# EAGLE board Cell Characteristic Modeling (EAGLE 7.6.0)

Size 73.58 x 63.39 mm. Coordinates in mm from the lower left corner, seen from the top.
Outline: 0,0 56.82,0 56.82,53.33 0,53.33 0,0
Copper layers (1*16): Top 0.035mm / dielectric 1.5mm / Bottom 0.035mm
Design rules "default": minimum track width 10mil, minimum drill 24mil, track to track 8mil, track to pad 8mil, pad to pad 8mil, via to via 8mil, smd to smd 8mil, copper to edge 40mil, drill to drill 8mil, minimum pad ring 10mil, minimum via ring 8mil, stop-mask expansion 4mil, vias tented up to drill 0mil, thermal gap 10mil

## Footprints (pad centres in the part's own frame; a part is rotated, then mirrored left to right if it is on the bottom)
M3XXH = drill 1.016 long: 1 -3.81,3.81; 2 -3.81,-3.81; O -6.35,-3.81; P 6.35,-3.81; P@ 6.35,3.81; S -6.35,3.81
2P-2.54-65/35MIL = drill 0.889 pad 1.651 square: 1 0,1.27 | drill 0.889 pad 1.651: 2 0,-1.27
PIEZO-22MM = drill 1 pad 2.54: P$1 -5,0; P$2 5,0
PHOTORESISTOR-2.54 = drill 1 pad 1.5: P$1 -1.27,0; P$2 1.27,0
0207/10 = drill 0.813 octagon: 1 -5.08,0; 2 5.08,0
TL1105 = drill 1 pad 1.676: 1 -2.25,3.25; 2 2.25,3.25; 3 -2.25,-3.25; 4 2.25,-3.25
TO220 = drill 1.118 long: 1 -2.54,-6.35; 2 0,-6.35; 3 2.54,-6.35 | hole 3.302: 0,11.176
ARDUINO_UNO = drill 1.016 pad 1.88: 0 63.5,50.8; 1 60.96,50.8; 2 58.42,50.8; 3 55.88,50.8; 3.3V 35.56,2.54; 4 53.34,50.8; 5 50.8,50.8; 5V 38.1,2.54; 6 48.26,50.8; 7 45.72,50.8; 8 41.656,50.8; 9 39.116,50.8; 10 36.576,50.8; 11 34.036,50.8; 12 31.496,50.8; 13 28.956,50.8; A0 50.8,2.54; A1 53.34,2.54; A2 55.88,2.54; A3 58.42,2.54; A4 60.96,2.54; A5 63.5,2.54; AREF 23.876,50.8; GND 26.416,50.8; GND. 43.18,2.54; GND.. 40.64,2.54; I/OREF 30.48,2.54; N/C 27.94,2.54; RESET 33.02,2.54; SCL 18.796,50.8; SDA 21.336,50.8; VIN 45.72,2.54 | hole 3.2: 66.04,7.62; 66.04,35.56; 15.24,50.8; 13.97,2.54

## Placement (x,y rotation side)
K1  [M3XXH]  5,137.08 0 top  (outside the outline)
K2  [M3XXH]  5,22.78 0 top
K3  [M3XXH]  5,35.48 0 top
K4  [M3XXH]  5,48.18 0 top
K5  [M3XXH]  5,60.88 0 top
K6  [M3XXH]  5,200.58 0 top  (outside the outline)
K7  [M3XXH]  5,213.28 0 top  (outside the outline)
L1  [2P-2.54-65/35MIL]  5,289.48 0 top  (outside the outline)
L2  [2P-2.54-65/35MIL]  5,302.18 0 top  (outside the outline)
L6  [2P-2.54-65/35MIL]  5,314.88 0 top  (outside the outline)
L8  [2P-2.54-65/35MIL]  5,327.58 0 top  (outside the outline)
P1  5V  [2P-2.54-65/35MIL]  5,73.58 0 top  (outside the outline)
PIEZO1  [PIEZO-22MM]  5,365.68 0 top  (outside the outline)
R1  [PHOTORESISTOR-2.54]  5,162.48 0 top  (outside the outline)
R2  [PHOTORESISTOR-2.54]  5,175.18 0 top  (outside the outline)
R3  [PHOTORESISTOR-2.54]  5,187.88 0 top  (outside the outline)
R4  [PHOTORESISTOR-2.54]  5,352.98 0 top  (outside the outline)
R5  1k‎Ω  [0207/10]  5,391.08 0 top  (outside the outline)
R6  1k‎Ω  [0207/10]  5,251.38 0 top  (outside the outline)
R7  1k‎Ω  [0207/10]  5,264.08 0 top  (outside the outline)
R8  1k‎Ω  [0207/10]  5,276.78 0 top  (outside the outline)
R9  1k‎Ω  [0207/10]  5,340.28 0 top  (outside the outline)
S1  [TL1105]  5,378.38 0 top  (outside the outline)
T1  [TO220]  5,149.78 0 top  (outside the outline)
T2  [TO220]  5,124.38 0 top  (outside the outline)
T3  [TO220]  5,111.68 0 top  (outside the outline)
T4  [TO220]  5,98.98 0 top  (outside the outline)
T5  [TO220]  5,86.28 0 top  (outside the outline)
T6  [TO220]  5,225.98 0 top  (outside the outline)
T7  [TO220]  5,238.68 0 top  (outside the outline)
U1  [ARDUINO_UNO]  5,10.08 0 top

## Library data of the parts
K1-K7 L1 L2 L6 L8 P1 PIEZO1 R1-R9 S1 T1-T7 U1 = AUTODESK_CIRCUITS_BREADBOARD

## Nets
N$1: T1.1 U1.2
N$2: K2.P
N$3: K2.S L1.2
N$4: K2.2 T2.2
N$5: K3.P
N$6: K3.S L2.2
N$7: K4.P
N$8: K4.S L6.2
N$9: K5.P
N$10: K5.S L8.2
N$11: K5.2 T5.2
N$12: L1.1 L2.1 L6.1 L8.1
N$13: K1.1 K2.1 K3.1 K4.1 K5.1 K6.2 K7.2 P1.2
N$14: K1.P
N$15: K1.P@
N$16: K1.O
N$17: K1.S K2.P@ K3.P@ K4.P@ K5.P@
N$18: K1.2 T1.2
N$19: T2.1 U1.3
N$20: K2.O
N$21: T3.1 U1.4
N$22: K3.2 T3.2
N$23: K3.O
N$24: T4.1 U1.5
N$25: K4.2 T4.2
N$26: K4.O
N$27: T5.1 U1.6
N$28: K5.O
N$29: K7.1 T7.2
N$30: K7.P U1.A5
N$31: K7.S R1.P$2 R6.2
N$32: K6.1 T6.2
N$33: K6.P U1.A4
N$34: K6.P@
N$35: T6.1 U1.7
N$36: T7.1 U1.8
N$37: K7.P@
N$38: K6.S R3.P$2 R8.2
N$39: K7.O R2.P$2 R7.2
N$40: R6.1 R7.1 R8.1 R9.1 U1.GND.
N$41: K6.O R4.P$2 R9.2
N$42: S1.4
N$43: R1.P$1 R2.P$1 R3.P$1 R4.P$1 S1.2 U1.5V
N$44: S1.1 U1.10
N$45: R5.2 S1.3
N$46: PIEZO1.P$1 U1.11
N$47: P1.1 PIEZO1.P$2 R5.1 T1.3 T2.3 T3.3 T4.3 T5.3 T6.3 T7.3 U1.GND

## Tracks (layer width: path | path; a pad name or v marks a point on that pad's centre or on a via)
N$1  (1 unrouted)
N$3  (1 unrouted)
N$4  (1 unrouted)
N$6  (1 unrouted)
N$8  (1 unrouted)
N$10  (1 unrouted)
N$11  (1 unrouted)
N$12  (3 unrouted)
N$13  (7 unrouted)
N$17  (4 unrouted)
N$18  (1 unrouted)
N$19  (1 unrouted)
N$21  (1 unrouted)
N$22  (1 unrouted)
N$24  (1 unrouted)
N$25  (1 unrouted)
N$27  (1 unrouted)
N$29  (1 unrouted)
N$30  (1 unrouted)
N$31  (2 unrouted)
N$32  (1 unrouted)
N$33  (1 unrouted)
N$35  (1 unrouted)
N$36  (1 unrouted)
N$38  (2 unrouted)
N$39  (2 unrouted)
N$40  (4 unrouted)
N$41  (2 unrouted)
N$43  (5 unrouted)
N$44  (1 unrouted)
N$45  (1 unrouted)
N$46  (1 unrouted)
N$47  (10 unrouted)